# Altium PCB Layout.PcbDoc
Units mil, origin at the board's own origin, x right, y up, seen from the top; angles counter-clockwise.
Board outline 1735 x 1065 mil, 4 copper layers (Top Layer, Layer 1, Layer 2, Bottom Layer), stack 23.756 mil thick; 105 components, 105 nets, 934 pads, 0 vias.
Unrouted connection lines stored in the file: 567.
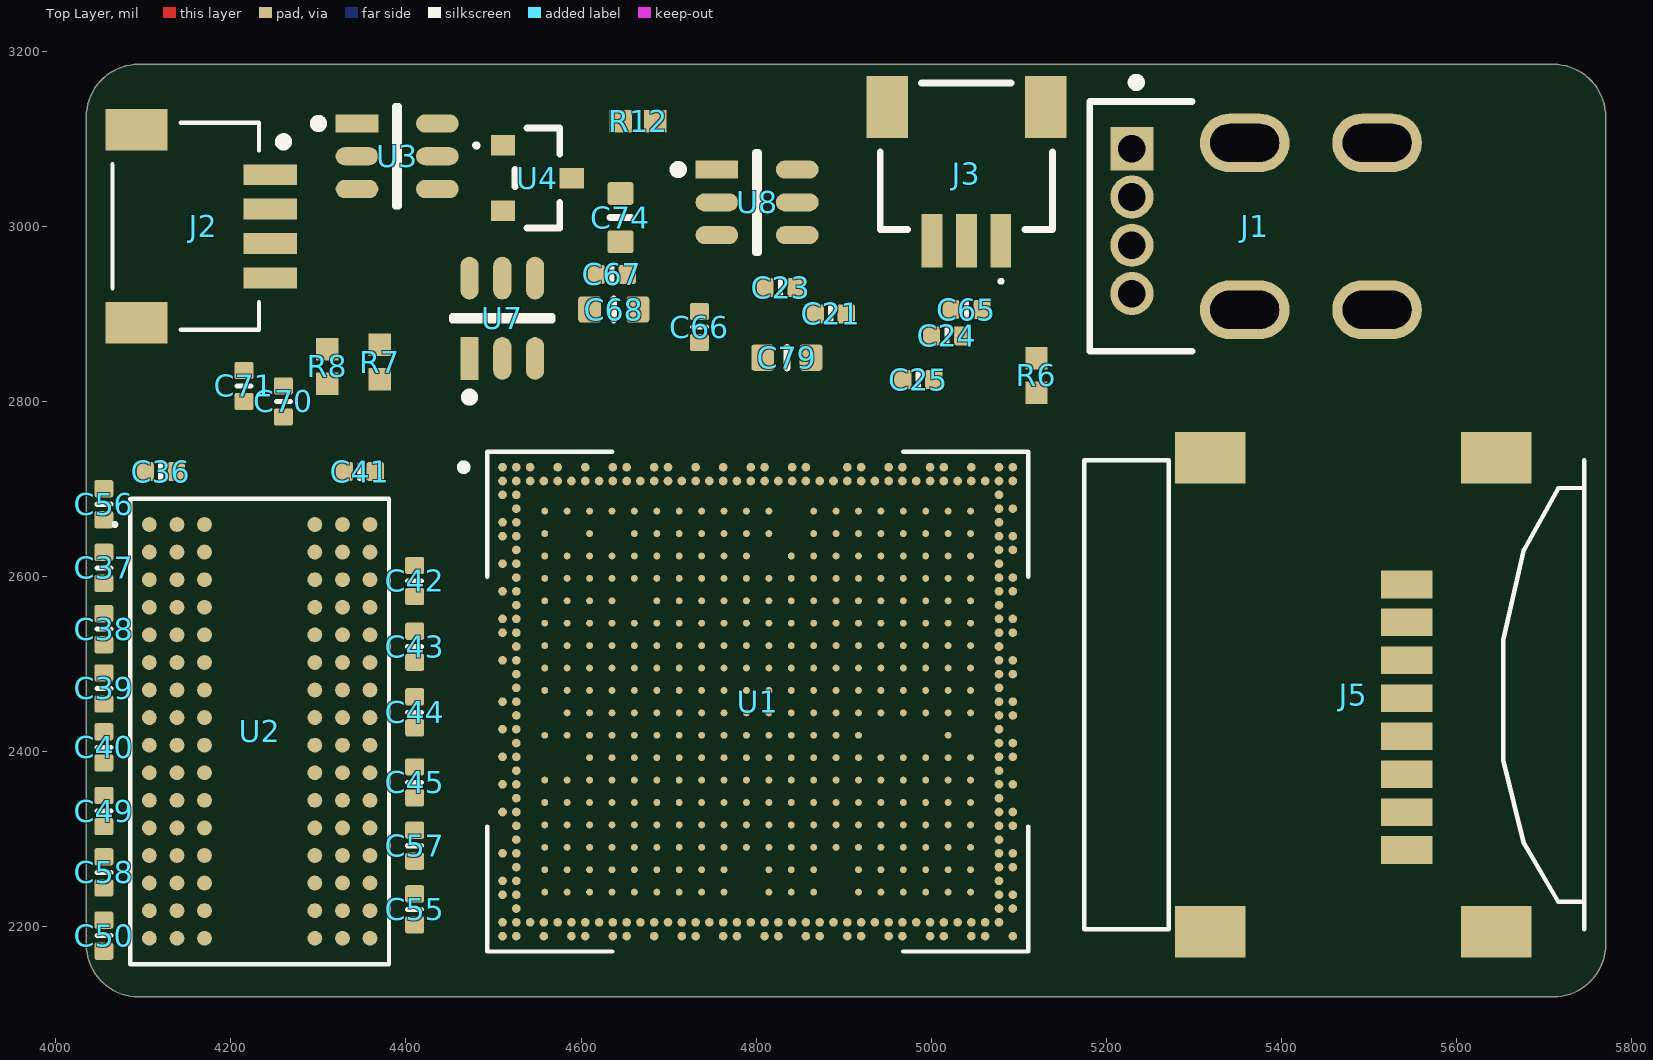
[diagram p0: Top Layer view]
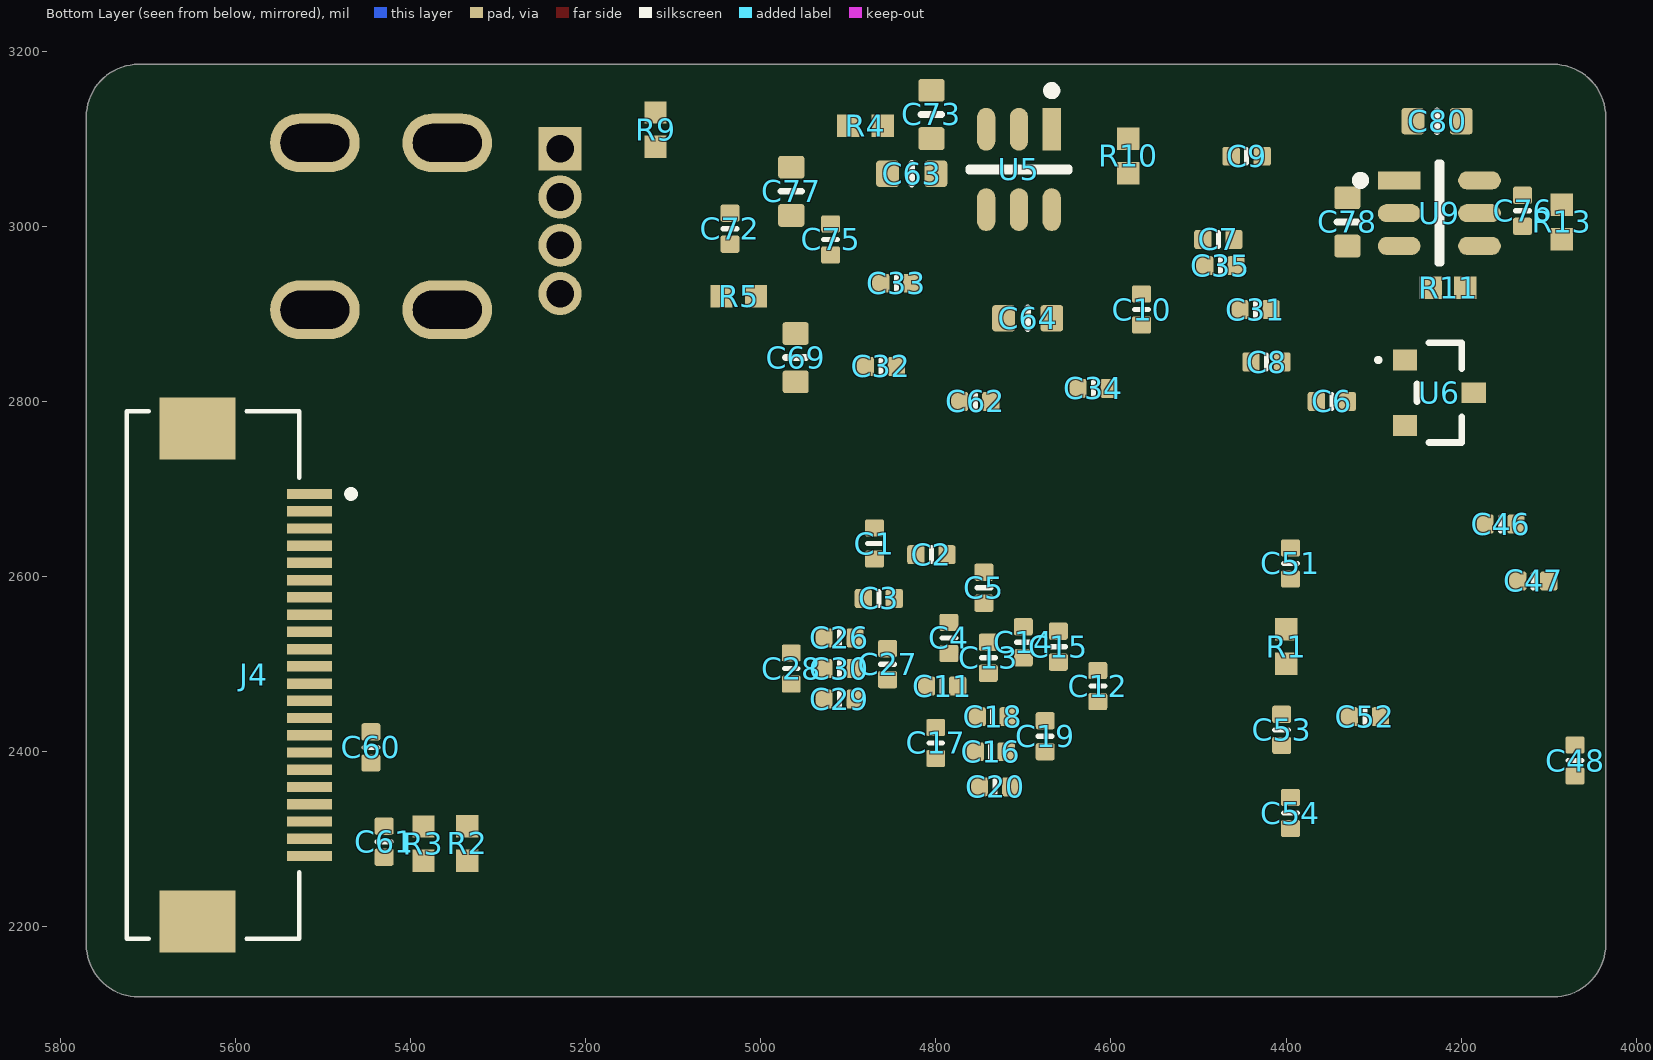
[diagram p1: Bottom Layer view, seen from below]

## Layer stack, top to bottom
Top Solder: solder mask 0.4, Solder Resist, Dk 3.5
Top Layer: signal copper 1.4
Dielectric 2: prepreg 2.8, PP-006, Dk 4.1
Layer 1: signal copper 1.378
Dielectric 1: dielectric 12.6, FR-4, Dk 4.8
Layer 2: signal copper 1.378
Dielectric 3: prepreg 2.8, PP-006, Dk 4.1
Bottom Layer: signal copper 1.4
Bottom Solder: solder mask 0.4, Solder Resist, Dk 3.5

## Board outline
4035,2180 4035,3125 cw(c4095,3125) 4095,3185 5710,3185 cw(c5710,3125) 5770,3125 5770,2180 cw(c5710,2180) 5710,2120 4095,2120 cw(c4095,2180)

## Design rules (kind name [scope] priority, off if disabled: settings)
Clearance [All] p1: gap=10 ignorepadtopadclearanceinfootprint=FALSE
PolygonConnect [All] p1: connectstyle=Relief reliefconductorwidth=10 reliefentries=4 polygonreliefangle="90 Angle" airgapwidth=10
RoutingVias [All] p1: holewidth=28 width=50 viastyle="Through Hole" minholewidth=28 minwidth=50 maxholewidth=28 maxwidth=50
SolderMaskExpansion [All] p1: expansion=4 istentingtop=FALSE
SupplyNets "Schematic Supply Nets_9" [InNet('VDDA_0V9')] p1: voltage=0.000
SupplyNets "Schematic Supply Nets_8" [InNet('VCC1V2_DDR')] p2: voltage=0.000
SupplyNets "Schematic Supply Nets_2" [InNet('VCC_1V8')] p3: voltage=0.000
SupplyNets "Schematic Supply Nets_6" [InNet('VCC0V9_CPU')] p4: voltage=0.000
SupplyNets "Schematic Supply Nets_3" [InNet('VDD0V9_GPU_NPU')] p5: voltage=0.000
SupplyNets "Schematic Supply Nets_1" [InNet('VDD0V9_LOGIC')] p6: voltage=0.000
SupplyNets "Schematic Supply Nets_24" [InNet('5V')] p7: voltage=0.000
SupplyNets "Schematic Supply Nets_19" [InNet('VDD_GPU')] p8: voltage=0.000
SupplyNets "Schematic Supply Nets_16" [InNet('VDD_LOGIC')] p9: voltage=0.000
SupplyNets "Schematic Supply Nets_15" [InNet('VCC_DDR')] p10: voltage=0.000
SupplyNets "Schematic Supply Nets_14" [InNet('VDD_NPU')] p11: voltage=0.000
SupplyNets "Schematic Supply Nets_12" [InNet('VCC0V6_DDR')] p12: voltage=0.000
SupplyNets "Schematic Supply Nets_11" [InNet('VCC5V0_SYS')] p13: voltage=0.000
SupplyNets "Schematic Supply Nets_7" [InNet('VDD_CPU')] p14: voltage=0.000
SupplyNets "Schematic Supply Nets_5" [InNet('VCC3V3_SYS')] p15: voltage=0.000
SupplyNets "Schematic Supply Nets_4" [InNet('GND')] p16: voltage=0.000
SupplyNets "Schematic Supply Nets" [InNet('VCC3V3_SD')] p17: voltage=0.000
Width [All] p1: maxlimit=10 minlimit=10 preferedwidth=10
30 further rules are at their usual default settings.

## Classes and differential pairs
component class U_Connectors: C60 C61 J1 J2 J3 J4 J5
component class U_RK3566: R2 R3 U1
component class U_RK3566_Power: C1 C2 C3 C4 C5 C6 C7 C8 C9 C10 C11 C12 C13 C14 C15 C16 C17 C18 C19 C20 C21 C23 C24 C25 C26 C27 C28 C29 C30 C31 C32 C33 C34 C35
component class U_Power: C62 C63 C64 C65 C66 C67 C68 C69 C70 C71 C72 C73 C74 C75 C76 C77 C78 C79 C80 L5 L6 R4 R5 R6 R7 R8 R9 R10 R11 R12 R13 U3 U4 U5 U6 U7 U8 U9 Y1
component class U_DDR4: C36 C37 C38 C39 C40 C41 C42 C43 C44 C45 C46 C47 C48 C49 C50 C51 C52 C53 C54 C55 C56 C57 C58 R1 U2

## Components (designator, comment, footprint, x,y, rotation, side; value= is the part's Value field where it differs from the comment)
C1 "GRM155R71H104KE14D" GRM155R71H104KE14D 4870,2637.72 r90 bottom value=100n
C2 "GRM155R71H104KE14D" GRM155R71H104KE14D 4805,2625 r180 bottom value=100n
C3 "GRM155R71H104KE14D" GRM155R71H104KE14D 4865,2575 r0 bottom value=100n
C4 "GRM155R71H104KE14D" GRM155R71H104KE14D 4785,2530 r270 bottom value=100n
C5 "GRM155R71H104KE14D" GRM155R71H104KE14D 4745,2587.28 r90 bottom value=100n
C6 "GRM155R71H104KE14D" GRM155R71H104KE14D 4347.72,2800 r180 bottom value=100n
C7 "GRM155R71H104KE14D" GRM155R71H104KE14D 4477.28,2985 r180 bottom value=100n
C8 "GRM155R71H104KE14D" GRM155R71H104KE14D 4422.28,2845 r180 bottom value=100n
C9 "GRM155R71H104KE14D" GRM155R71H104KE14D 4445,3080 r180 bottom value=100n
C10 "GRM155R71H104KE14D" GRM155R71H104KE14D 4565,2905 r90 bottom value=100n
C11 "GRM155R71H104KE14D" GRM155R71H104KE14D 4792.72,2475 r0 bottom value=100n
C12 "GRM155R71H104KE14D" GRM155R71H104KE14D 4615,2475 r90 bottom value=100n
C13 "GRM155R71H104KE14D" GRM155R71H104KE14D 4740,2507.28 r90 bottom value=100n
C14 "GRM155R71H104KE14D" GRM155R71H104KE14D 4700,2525 r90 bottom value=100n
C15 "GRM155R71H104KE14D" GRM155R71H104KE14D 4660,2520 r90 bottom value=100n
C16 "GRM155R71H104KE14D" GRM155R71H104KE14D 4737.28,2400 r180 bottom value=100n
C17 "GRM155R71H104KE14D" GRM155R71H104KE14D 4800,2410 r270 bottom value=100n
C18 "GRM155R71H104KE14D" GRM155R71H104KE14D 4735,2440 r0 bottom value=100n
C19 "GRM155R71H104KE14D" GRM155R71H104KE14D 4675,2417.72 r270 bottom value=100n
C20 "GRM155R71H104KE14D" GRM155R71H104KE14D 4732.28,2360 r180 bottom value=100n
C21 "GRM155R60J475ME47D" GRM155R60J475ME47D 4885,2900 r0 top value=4u7
C23 "GRM155R71H104KE14D" GRM155R71H104KE14D 4827.72,2930 r0 top value=100n
C24 "GRM155R71H104KE14D" GRM155R71H104KE14D 5017.72,2875 r0 top value=100n
C25 "GRM155R71H104KE14D" GRM155R71H104KE14D 4985,2825 r0 top value=100n
C26 "GRM155R71H104KE14D" GRM155R71H104KE14D 4910,2530 r180 bottom value=100n
C27 "GRM155R71H104KE14D" GRM155R71H104KE14D 4855,2500 r90 bottom value=100n
C28 "GRM155R71H104KE14D" GRM155R71H104KE14D 4965,2495 r90 bottom value=100n
C29 "GRM155R71H104KE14D" GRM155R71H104KE14D 4910,2460 r180 bottom value=100n
C30 "GRM155R71H104KE14D" GRM155R71H104KE14D 4910,2495 r180 bottom value=100n
C31 "GRM155R60J475ME47D" GRM155R60J475ME47D 4435,2905 r180 bottom value=4u7
C32 "GRM155R60J475ME47D" GRM155R60J475ME47D 4862.72,2840 r180 bottom value=4u7
C33 "GRM155R71H104KE14D" GRM155R71H104KE14D 4845,2935 r180 bottom value=100n
C34 "GRM155R71H104KE14D" GRM155R71H104KE14D 4620,2815 r180 bottom value=100n
C35 "GRM155R71H104KE14D" GRM155R71H104KE14D 4475,2955 r180 bottom value=100n
C36 "GRM155R71H104KE14D" GRM155R71H104KE14D 4120,2720 r0 top value=100n
C37 "GRM155R71H104KE14D" GRM155R71H104KE14D 4055,2610 r90 top value=100n
C38 "GRM155R71H104KE14D" GRM155R71H104KE14D 4055,2540 r90 top value=100n
C39 "GRM155R71H104KE14D" GRM155R71H104KE14D 4055,2472.28 r270 top value=100n
C40 "GRM155R71H104KE14D" GRM155R71H104KE14D 4055,2405 r270 top value=100n
C41 "GRM155R71H104KE14D" GRM155R71H104KE14D 4347.28,2720 r180 top value=100n
C42 "GRM155R71H104KE14D" GRM155R71H104KE14D 4410,2595 r90 top value=100n
C43 "GRM155R71H104KE14D" GRM155R71H104KE14D 4410,2520 r90 top value=100n
C44 "GRM155R71H104KE14D" GRM155R71H104KE14D 4410,2445 r270 top value=100n
C45 "GRM155R71H104KE14D" GRM155R71H104KE14D 4410,2365 r90 top value=100n
C46 "GRM155R71H104KE14D" GRM155R71H104KE14D 4155,2660 r180 bottom value=100n
C47 "GRM155R71H104KE14D" GRM155R71H104KE14D 4117.72,2595 r0 bottom value=100n
C48 "GRM155R71H104KE14D" GRM155R71H104KE14D 4070,2390 r270 bottom value=100n
C49 "GRM155R71H104KE14D" GRM155R71H104KE14D 4055,2332.28 r270 top value=100n
C50 "GRM155R71H104KE14D" GRM155R71H104KE14D 4055,2190 r270 top value=100n
C51 "GRM155R71H104KE14D" GRM155R71H104KE14D 4395,2615 r270 bottom value=100n
C52 "GRM155R71H104KE14D" GRM155R71H104KE14D 4310,2440 r0 bottom value=100n
C53 "GRM155R71H104KE14D" GRM155R71H104KE14D 4405,2425 r90 bottom value=100n
C54 "GRM155R71H104KE14D" GRM155R71H104KE14D 4395,2330 r90 bottom value=100n
C55 "GRM155R71H104KE14D" GRM155R71H104KE14D 4410,2220 r90 top value=100n
C56 "GRM155R61E105KA12D" GRM155R61E105KA12D 4055,2682.72 r90 top value=1u
C57 "GRM155R61E105KA12D" GRM155R61E105KA12D 4410,2292.72 r90 top value=1u
C58 "GRM155R71H104KE14D" GRM155R71H104KE14D 4055,2262.28 r270 top value=100n
C60 "GRM155R71H104KE14D" GRM155R71H104KE14D 5445,2405 r90 bottom value=100n
C61 "GRM155R61E105KA12D" GRM155R61E105KA12D 5430,2297.28 r90 bottom value=1u
C62 "GRM155R61E105KA12D" GRM155R61E105KA12D 4755,2800 r0 bottom value=1u
C63 "GRM188R61C226ME01D" GRM188R61C226ME01D 4827.44,3060 r0 bottom value=22u
C64 "GRM188R61C226ME01D" GRM188R61C226ME01D 4695,2895 r0 bottom value=22u
C65 "GRM155R61E105KA12D" GRM155R61E105KA12D 5040,2905 r180 top value=1u
C66 "GRM155R61E105KA12D" GRM155R61E105KA12D 4735,2885 r270 top value=1u
C67 "GRM155R61E105KA12D" GRM155R61E105KA12D 4635,2945 r180 top value=1u
C68 "GRM188R61C226ME01D" GRM188R61C226ME01D 4637.28,2905 r180 top value=22u
C69 "GRM188R61C226ME01D" GRM188R61C226ME01D 4960,2850 r90 bottom value=22u
C70 "GRM155R61E105KA12D" GRM155R61E105KA12D 4260,2800 r90 top value=1u
C71 "GRM155R61E105KA12D" GRM155R61E105KA12D 4215,2817.72 r90 top value=1u
C72 "GRM155R61E105KA12D" GRM155R61E105KA12D 5035,2997.28 r90 bottom value=1u
C73 "GRM188R61C226ME01D" GRM188R61C226ME01D 4805,3127.72 r90 bottom value=22u
C74 "GRM188R61C226ME01D" GRM188R61C226ME01D 4645,3010 r90 top value=22u
C75 "GRM155R61E105KA12D" GRM155R61E105KA12D 4920,2985 r90 bottom value=1u
C76 "GRM155R61E105KA12D" GRM155R61E105KA12D 4130,3017.72 r90 bottom value=1u
C77 "GRM188R61C226ME01D" GRM188R61C226ME01D 4965,3040 r90 bottom value=22u
C78 "GRM188R61C226ME01D" GRM188R61C226ME01D 4330,3005 r90 bottom value=22u
C79 "GRM188R61C226ME01D" GRM188R61C226ME01D 4835,2850 r180 top value=22u
C80 "GRM188R61C226ME01D" GRM188R61C226ME01D 4227.56,3120 r180 bottom value=22u
J1 "673298000" 673298000 5455,3000 r90 top
J2 "SM04B-SRSS-TB" SM04B-SRSS-TB 4245,3000 r270 top
J3 "SM03B-SRSS-TB" SM03B-SRSS-TB 5040,3080 r180 top
J4 "F305-1A7H1-21022-E100" F305-1A7H1-21022-E100 5625.24,2487.68 r270 bottom
J5 "47219-2001" 47219-2001 5460,2465 r90 top
R1 "RES 240" RC0402FR-0718KL 4400,2520 r90 bottom value=240
R2 "RES 2.2K" RC0402FR-075K6L 5335,2295.31 r90 bottom value=2k2
R3 "RES 2.2K" RC0402FR-075K6L 5385,2295 r90 bottom value=2k2
R4 "RC0402FR-075K6L" RC0402FR-075K6L 4880.31,3115 r180 bottom value=5k6
R5 "RC0402FR-071KL" RC0402FR-071KL 5025,2920 r180 bottom value=1k
R6 "RC0402FR-075K6L" RC0402FR-075K6L 5120,2829.68 r90 top value=5k6
R7 "RC0402FR-071KL" RC0402FR-071KL 4370,2845 r90 top value=1k
R8 "RC0402FR-075K6L" RC0402FR-075K6L 4310,2840 r90 top value=5k6
R9 "RC0402FR-071KL" RC0402FR-071KL 5120,3110.31 r90 bottom value=1k
R10 "RC0402FR-075K6L" RC0402FR-075K6L 4580,3080.31 r90 bottom value=5k6
R11 "RC0402FR-075K6L" RC0402FR-075K6L 4215,2930 r180 bottom value=5k6
R12 "RC0402FR-071KL" RC0402FR-071KL 4665,3120 r180 top value=1k
R13 "RC0402FR-071KL" RC0402FR-071KL 4085,3005 r90 bottom value=1k
U1 "RK3566" RK3566 4801.61,2457.2 r0 top
U2 "MT40A512M16LY-075:E" MT40A512M16LY-075:E 4232.99,2423.27 r0 top
U3 "AP63300QWU-7" AP63300QWU-7 4390,3080 r0 top
U4 "AP2138N-3.3TRG1" AP2138N-3.3TRG1 4550,3055 r0 top
U5 "AP63300QWU-7" AP63300QWU-7 4705,3065 r270 bottom
U6 "AP2138N-3.3TRG1" AP2138N-3.3TRG1 4225,2810 r180 bottom
U7 "AP63300QWU-7" AP63300QWU-7 4510,2895 r90 top
U8 "AP63300QWU-7" AP63300QWU-7 4800.89,3027.4 r0 top
U9 "AP63300QWU-7" AP63300QWU-7 4225,3015 r180 bottom

## Footprints (in the part's own frame and the unit in brackets; to place one, negate y for a bottom-side part, rotate by r counter-clockwise, add the part's x,y. Pads: shape width x height; smd on the part's side, far side on the other; paste and mask are expansions set on the pad)
47219-2001 [mm] "MicroSD Hinge Molex"
  rect 0.8x1.5 smd: 1(3.2,-2.1) 2(2.1,-2.1) 3(1,-2.1) 4(-0.1,-2.1) 5(-1.2,-2.1) 6(-2.3,-2.1) 7(-3.4,-2.1) 8(-4.5,-2.1)
  rect 1.5x2.05 smd: G1(6.875,-4.7) G2(6.875,3.6) G3(-6.875,3.6) G4(-6.875,-4.7)
  silkscreen extent -6.8,-7.25 6.8,7.25, body extent -7.3,-7.21 7.3,7.28, height 1.87
673298000 [mm]
  rect 1.25x1.25 hole 0.8 paste-2539.97 mask+0: 1(2.25,5.74)
  round 1.25 hole 0.8 paste-2539.97 mask+0: 2(0.85,5.74) 3(-0.55,5.74) 4(-1.95,5.74)
  oval 1.7x2.6 hole 2 slot 1.1 at 0 deg paste-2539.97 mask+0: 5(-2.42,2.47) 6(2.42,2.47) 7(-2.42,-1.37) 8(2.42,-1.37)
  silkscreen extent -3.62,4 4.3,6.97, body extent -3.5,-6.84 3.5,6.84, height 14.52
AP2138N-3.3TRG1 [mm] "SOT23, 3-Leads, Body 2.9x1.3mm, Pitch 0.95mm"
  rect 0.7x0.6 smd paste-0.05: 1(-1,0.95) 2(-1,-0.95) 3(1,0)
  silkscreen extent -1.79,-1.45 0.65,1.45, body extent -1.3,-1.5 1.3,1.5, height 1.1
AP63300QWU-7 [mm]
  rect 1.24x0.526 smd paste+0 mask+0: 1(-1.165,0.95)
  rrect100% 1.24x0.526 smd paste+0 mask+0: 2(-1.165,0) 3(-1.165,-0.95) 4(1.166,-0.95) 5(1.166,0) 6(1.166,0.95)
  silkscreen extent -2.41,-1.45 0.05,1.45, body extent -2.04,-1.7 2.04,1.7, height 0.25
F305-1A7H1-21022-E100 [mm] "Amphenol FPC 22P 0.5mm"
  rect 0.3x1.3 smd mask+0.05: 1(-5.25,2.8) 2(-4.75,2.8) 3(-4.25,2.8) 4(-3.75,2.8) 5(-3.25,2.8) 6(-2.75,2.8) 7(-2.25,2.8) 8(-1.75,2.8) 9(-1.25,2.8) 10(-0.75,2.8) 11(-0.25,2.8) 12(0.25,2.8) 13(0.75,2.8) 14(1.25,2.8) 15(1.75,2.8) 16(2.25,2.8) 17(2.75,2.8) 18(3.25,2.8) 19(3.75,2.8) 20(4.25,2.8) 21(4.75,2.8) 22(5.25,2.8)
  rect 1.8x2.2 smd: SH1(-7.15,-0.45) SH2(7.15,-0.45)
  silkscreen extent -7.65,-2.5 7.65,4.1, body extent -7.65,-2.25 7.65,3.45, height 2
GRM155R60J475ME47D [mm] "Chip Capacitor, Body 1.0x0.5mm, Height 0.6mm, IPC High Density"
  rrect25% 0.5x0.55 smd: 1(-0.45,0) 2(0.45,0)
  silkscreen extent 0,-0.2 0,0.2, body extent -0.5,-0.25 0.5,0.25, height 0.6
GRM155R61E105KA12D [mm] "Chip Capacitor, Body 1.0x0.5mm, Height 0.6mm, IPC High Density"
  rrect25% 0.5x0.55 smd: 1(-0.45,0) 2(0.45,0)
  silkscreen extent 0,-0.2 0,0.2, body extent -0.5,-0.25 0.5,0.25, height 0.6
GRM155R71H104KE14D [mm] "Chip Capacitor, Body 1.0x0.5mm, Height 0.6mm, IPC High Density"
  rrect25% 0.5x0.55 smd: 1(-0.45,0) 2(0.45,0)
  silkscreen extent 0,-0.2 0,0.2, body extent -0.5,-0.25 0.5,0.25, height 0.6
GRM188R61C226ME01D [mm] "Chip Capacitor, Body 1.6x0.8mm, Height 1.0mm, IPC High Density"
  rrect25% 0.66x0.76 smd: 1(-0.7,0) 2(0.7,0)
  silkscreen extent 0,-0.3 0,0.3, body extent -0.8,-0.4 0.8,0.4, height 0.95
MT40A512M16LY-075:E [mm]
  round 0.43 smd: A1(-3.2,6) A2(-2.4,6) A3(-1.6,6) A7(1.6,6) A8(2.4,6) A9(3.2,6) B1(-3.2,5.2) B2(-2.4,5.2) B3(-1.6,5.2) B7(1.6,5.2) B8(2.4,5.2) B9(3.2,5.2) C1(-3.2,4.4) C2(-2.4,4.4) C3(-1.6,4.4) C7(1.6,4.4) C8(2.4,4.4) C9(3.2,4.4) D1(-3.2,3.6) D2(-2.4,3.6) D3(-1.6,3.6) D7(1.6,3.6) D8(2.4,3.6) D9(3.2,3.6) E1(-3.2,2.8) E2(-2.4,2.8) E3(-1.6,2.8) E7(1.6,2.8) E8(2.4,2.8) E9(3.2,2.8) F1(-3.2,2) F2(-2.4,2) F3(-1.6,2) F7(1.6,2) F8(2.4,2) F9(3.2,2) G1(-3.2,1.2) G2(-2.4,1.2) G3(-1.6,1.2) G7(1.6,1.2) G8(2.4,1.2) G9(3.2,1.2) H1(-3.2,0.4) H2(-2.4,0.4) H3(-1.6,0.4) H7(1.6,0.4) H8(2.4,0.4) H9(3.2,0.4) J1(-3.2,-0.4) J2(-2.4,-0.4) J3(-1.6,-0.4) J7(1.6,-0.4) J8(2.4,-0.4) J9(3.2,-0.4) K1(-3.2,-1.2) K2(-2.4,-1.2) K3(-1.6,-1.2) K7(1.6,-1.2) K8(2.4,-1.2) K9(3.2,-1.2) L1(-3.2,-2) L2(-2.4,-2) L3(-1.6,-2) L7(1.6,-2) L8(2.4,-2) L9(3.2,-2) M1(-3.2,-2.8) M2(-2.4,-2.8) M3(-1.6,-2.8) M7(1.6,-2.8) M8(2.4,-2.8) M9(3.2,-2.8) N1(-3.2,-3.6) N2(-2.4,-3.6) N3(-1.6,-3.6) N7(1.6,-3.6) N8(2.4,-3.6) N9(3.2,-3.6) P1(-3.2,-4.4) P2(-2.4,-4.4) P3(-1.6,-4.4) P7(1.6,-4.4) P8(2.4,-4.4) P9(3.2,-4.4) R1(-3.2,-5.2) R2(-2.4,-5.2) R3(-1.6,-5.2) R7(1.6,-5.2) R8(2.4,-5.2) R9(3.2,-5.2) T1(-3.2,-6) T2(-2.4,-6) T3(-1.6,-6) T7(1.6,-6) T8(2.4,-6) T9(3.2,-6)
  silkscreen extent -4.25,-6.75 3.75,6.75, body extent -3.75,-6.75 3.75,6.75, height 1.2
RC0402FR-071KL [mm] "Chip Resistor, 2-Leads, Body 1.05x0.55mm, IPC Low Density"
  rect 0.65x0.65 smd: 1(-0.5,0) 2(0.5,0)
  body extent -0.53,-0.28 0.53,0.28, height 0.4
RC0402FR-075K6L [mm] "Chip Resistor, 2-Leads, Body 1.05x0.55mm, IPC Low Density"
  rect 0.65x0.65 smd: 1(-0.5,0) 2(0.5,0)
  body extent -0.53,-0.28 0.53,0.28, height 0.4
RC0402FR-0718KL [mm] "Chip Resistor, 2-Leads, Body 1.05x0.55mm, IPC Low Density"
  rect 0.65x0.65 smd: 1(-0.5,0) 2(0.5,0)
  body extent -0.53,-0.28 0.53,0.28, height 0.4
RK3566 [mm]
  round 0.2 smd mask+0.05: 1A1(-6.175,5.525) 1A2(-5.525,5.525) 1A3(-4.875,5.525) 1A4(-4.225,5.525) 1A5(-3.575,5.525) 1A6(-2.925,5.525) 1A7(-2.275,5.525) 1A8(-1.625,5.525) 1A9(-0.975,5.525) 1A10(-0.325,5.525) 1A11(0.325,5.525) 1A13(1.625,5.525) 1A14(2.275,5.525) 1A15(2.925,5.525) 1A16(3.575,5.525) 1A17(4.225,5.525) 1A18(4.875,5.525) 1A19(5.525,5.525) 1A20(6.175,5.525) 1B1(-6.175,4.875) 1B3(-4.875,4.875) 1B5(-3.575,4.875) 1B6(-2.925,4.875) 1B7(-2.275,4.875) 1B8(-1.625,4.875) 1B9(-0.975,4.875) 1B10(-0.325,4.875) 1B11(0.325,4.875) 1B13(1.625,4.875) 1B14(2.275,4.875) 1B15(2.925,4.875) 1B16(3.575,4.875) 1B17(4.225,4.875) 1B18(4.875,4.875) 1B19(5.525,4.875) 1B20(6.175,4.875) 1C1(-6.175,4.225) 1C2(-5.525,4.225) 1C3(-4.875,4.225) 1C4(-4.225,4.225) 1C5(-3.575,4.225) 1C6(-2.925,4.225) 1C7(-2.275,4.225) 1C8(-1.625,4.225) 1C9(-0.975,4.225) 1C10(-0.325,4.225) 1C12(0.975,4.225) 1C13(1.625,4.225) 1C14(2.275,4.225) 1C15(2.925,4.225) 1C16(3.575,4.225) 1C17(4.225,4.225) 1C18(4.875,4.225) 1C19(5.525,4.225) 1C20(6.175,4.225) 1D1(-6.175,3.575) 1D2(-5.525,3.575) 1D3(-4.875,3.575) 1D4(-4.225,3.575) 1D5(-3.575,3.575) 1D6(-2.925,3.575) 1D7(-2.275,3.575) 1D8(-1.625,3.575) 1D9(-0.975,3.575) 1D10(-0.325,3.575) 1D11(0.325,3.575) 1D12(0.975,3.575) 1D13(1.625,3.575) 1D14(2.275,3.575) 1D15(2.925,3.575) 1D16(3.575,3.575) 1D17(4.225,3.575) 1D18(4.875,3.575) 1D19(5.525,3.575) 1D20(6.175,3.575) 1E1(-6.175,2.925) 1E2(-5.525,2.925) 1E3(-4.875,2.925) 1E4(-4.225,2.925) 1E6(-2.925,2.925) 1E7(-2.275,2.925) 1E8(-1.625,2.925) 1E9(-0.975,2.925) 1E10(-0.325,2.925) 1E11(0.325,2.925) 1E12(0.975,2.925) 1E13(1.625,2.925) 1E14(2.275,2.925) 1E15(2.925,2.925) 1E16(3.575,2.925) 1E17(4.225,2.925) 1E18(4.875,2.925) 1E19(5.525,2.925) 1E20(6.175,2.925) 1F1(-6.175,2.275) 1F2(-5.525,2.275) 1F3(-4.875,2.275) 1F4(-4.225,2.275) 1F5(-3.575,2.275) 1F6(-2.925,2.275) 1F7(-2.275,2.275) 1F8(-1.625,2.275) 1F9(-0.975,2.275) 1F10(-0.325,2.275) 1F11(0.325,2.275) 1F12(0.975,2.275) 1F13(1.625,2.275) 1F14(2.275,2.275) 1F15(2.925,2.275) 1F16(3.575,2.275) 1F17(4.225,2.275) 1F18(4.875,2.275) 1F19(5.525,2.275) 1F20(6.175,2.275) 1G1(-6.175,1.625) 1G2(-5.525,1.625) 1G3(-4.875,1.625) 1G4(-4.225,1.625) 1G5(-3.575,1.625) 1G6(-2.925,1.625) 1G7(-2.275,1.625) 1G8(-1.625,1.625) 1G9(-0.975,1.625) 1G10(-0.325,1.625) 1G11(0.325,1.625) 1G12(0.975,1.625) 1G13(1.625,1.625) 1G14(2.275,1.625) 1G15(2.925,1.625) 1G16(3.575,1.625) 1G17(4.225,1.625) 1G18(4.875,1.625) 1G19(5.525,1.625) 1G20(6.175,1.625) 1H1(-6.175,0.975) 1H2(-5.525,0.975) 1H3(-4.875,0.975) 1H4(-4.225,0.975) 1H5(-3.575,0.975) 1H6(-2.925,0.975) 1H7(-2.275,0.975) 1H8(-1.625,0.975) 1H9(-0.975,0.975) 1H10(-0.325,0.975) 1H11(0.325,0.975) 1H12(0.975,0.975) 1H13(1.625,0.975) 1H14(2.275,0.975) 1H15(2.925,0.975) 1H16(3.575,0.975) 1H17(4.225,0.975) 1H18(4.875,0.975) 1H19(5.525,0.975) 1H20(6.175,0.975) 1J1(-6.175,0.325) 1J2(-5.525,0.325) 1J3(-4.875,0.325) 1J4(-4.225,0.325) 1J5(-3.575,0.325) 1J6(-2.925,0.325) 1J7(-2.275,0.325) 1J8(-1.625,0.325) 1J9(-0.975,0.325) 1J10(-0.325,0.325) 1J11(0.325,0.325) 1J12(0.975,0.325) 1J13(1.625,0.325) 1J14(2.275,0.325) 1J15(2.925,0.325) 1J16(3.575,0.325) 1J17(4.225,0.325) 1J18(4.875,0.325) 1J19(5.525,0.325) 1J20(6.175,0.325) 1K2(-5.525,-0.325) 1K3(-4.875,-0.325) 1K4(-4.225,-0.325) 1K5(-3.575,-0.325) 1K6(-2.925,-0.325) 1K7(-2.275,-0.325) 1K8(-1.625,-0.325) 1K9(-0.975,-0.325) 1K10(-0.325,-0.325) 1K11(0.325,-0.325) 1K12(0.975,-0.325) 1K13(1.625,-0.325) 1K14(2.275,-0.325) 1K15(2.925,-0.325) 1K16(3.575,-0.325) 1K17(4.225,-0.325) 1K18(4.875,-0.325) 1K19(5.525,-0.325) 1K20(6.175,-0.325) 1L1(-6.175,-0.975) 1L2(-5.525,-0.975) 1L3(-4.875,-0.975) 1L4(-4.225,-0.975) 1L5(-3.575,-0.975) 1L6(-2.925,-0.975) 1L7(-2.275,-0.975) 1L8(-1.625,-0.975) 1L9(-0.975,-0.975) 1L10(-0.325,-0.975) 1L11(0.325,-0.975) 1L12(0.975,-0.975) 1L13(1.625,-0.975) 1L14(2.275,-0.975) 1L15(2.925,-0.975) 1L19(5.525,-0.975) 1M3(-4.875,-1.625) 1M4(-4.225,-1.625) 1M5(-3.575,-1.625) 1M6(-2.925,-1.625) 1M7(-2.275,-1.625) 1M8(-1.625,-1.625) 1M9(-0.975,-1.625) 1M10(-0.325,-1.625) 1M11(0.325,-1.625) 1M12(0.975,-1.625) 1M13(1.625,-1.625) 1M14(2.275,-1.625) 1M15(2.925,-1.625) 1M16(3.575,-1.625) 1M17(4.225,-1.625) 1M18(4.875,-1.625) 1M19(5.525,-1.625) 1M20(6.175,-1.625) 1N1(-6.175,-2.275) 1N2(-5.525,-2.275) 1N3(-4.875,-2.275) 1N4(-4.225,-2.275) 1N5(-3.575,-2.275) 1N6(-2.925,-2.275) 1N7(-2.275,-2.275) 1N8(-1.625,-2.275) 1N9(-0.975,-2.275) 1N10(-0.325,-2.275) 1N11(0.325,-2.275) 1N12(0.975,-2.275) 1N13(1.625,-2.275) 1N14(2.275,-2.275) 1N15(2.925,-2.275) 1N16(3.575,-2.275) 1N17(4.225,-2.275) 1N18(4.875,-2.275) 1N19(5.525,-2.275) 1N20(6.175,-2.275) 1P1(-6.175,-2.925) 1P2(-5.525,-2.925) 1P3(-4.875,-2.925) 1P4(-4.225,-2.925) 1P5(-3.575,-2.925) 1P6(-2.925,-2.925) 1P7(-2.275,-2.925) 1P8(-1.625,-2.925) 1P9(-0.975,-2.925) 1P10(-0.325,-2.925) 1P11(0.325,-2.925) 1P12(0.975,-2.925) 1P13(1.625,-2.925) 1P14(2.275,-2.925) 1P15(2.925,-2.925) 1P16(3.575,-2.925) 1P17(4.225,-2.925) 1P18(4.875,-2.925) 1P19(5.525,-2.925) 1P20(6.175,-2.925) 1R1(-6.175,-3.575) 1R2(-5.525,-3.575) 1R3(-4.875,-3.575) 1R4(-4.225,-3.575) 1R5(-3.575,-3.575) 1R6(-2.925,-3.575) 1R7(-2.275,-3.575) 1R8(-1.625,-3.575) 1R9(-0.975,-3.575) 1R10(-0.325,-3.575) 1R11(0.325,-3.575) 1R12(0.975,-3.575) 1R13(1.625,-3.575) 1R14(2.275,-3.575) 1R15(2.925,-3.575) 1R16(3.575,-3.575) 1R17(4.225,-3.575) 1R18(4.875,-3.575) 1R19(5.525,-3.575) 1R20(6.175,-3.575) 1T1(-6.175,-4.225) 1T2(-5.525,-4.225) 1T3(-4.875,-4.225) 1T4(-4.225,-4.225) 1T5(-3.575,-4.225) 1T6(-2.925,-4.225) 1T7(-2.275,-4.225) 1T8(-1.625,-4.225) 1T9(-0.975,-4.225) 1T10(-0.325,-4.225) 1T11(0.325,-4.225) 1T12(0.975,-4.225) 1T13(1.625,-4.225) 1T14(2.275,-4.225) 1T15(2.925,-4.225) 1T16(3.575,-4.225) 1T17(4.225,-4.225) 1T18(4.875,-4.225) 1T19(5.525,-4.225) 1T20(6.175,-4.225) 1U1(-6.175,-4.875) 1U2(-5.525,-4.875) 1U3(-4.875,-4.875) 1U4(-4.225,-4.875) 1U5(-3.575,-4.875) 1U6(-2.925,-4.875) 1U7(-2.275,-4.875) 1U8(-1.625,-4.875) 1U9(-0.975,-4.875) 1U11(0.325,-4.875) 1U12(0.975,-4.875) 1U13(1.625,-4.875) 1U15(2.925,-4.875) 1U16(3.575,-4.875) 1U17(4.225,-4.875) 1U18(4.875,-4.875) 1U19(5.525,-4.875) 1U20(6.175,-4.875) 1V1(-6.175,-5.525) 1V2(-5.525,-5.525) 1V3(-4.875,-5.525) 1V4(-4.225,-5.525) 1V5(-3.575,-5.525) 1V6(-2.925,-5.525) 1V7(-2.275,-5.525) 1V8(-1.625,-5.525) 1V9(-0.975,-5.525) 1V11(0.325,-5.525) 1V12(0.975,-5.525) 1V13(1.625,-5.525) 1V15(2.925,-5.525) 1V16(3.575,-5.525) 1V17(4.225,-5.525) 1V18(4.875,-5.525) 1V19(5.525,-5.525) 1V20(6.175,-5.525)
  round 0.25 smd mask+0.05: A1(-7.4,6.8) A2(-7,6.8) A3(-6.6,6.8) A5(-5.8,6.8) A7(-5,6.8) A9(-4.2,6.8) A10(-3.8,6.8) A12(-3,6.8) A13(-2.6,6.8) A15(-1.8,6.8) A17(-1,6.8) A19(-0.2,6.8) A20(0.2,6.8) A22(1,6.8) A23(1.4,6.8) A26(2.6,6.8) A27(3,6.8) A29(3.8,6.8) A30(4.2,6.8) A32(5,6.8) A33(5.4,6.8) A35(6.2,6.8) A37(7,6.8) A38(7.4,6.8) AA2(-7,-1.2) AA37(7,-1.2) AA38(7.4,-1.2) AB1(-7.4,-1.6) AB2(-7,-1.6) AB37(7,-1.6) AB38(7.4,-1.6) AC2(-7,-2) AC37(7,-2) AD1(-7.4,-2.4) AD2(-7,-2.4) AD37(7,-2.4) AD38(7.4,-2.4) AE2(-7,-2.8) AE37(7,-2.8) AF1(-7.4,-3.2) AF2(-7,-3.2) AF37(7,-3.2) AF38(7.4,-3.2) AG2(-7,-3.6) AG37(7,-3.6) AG38(7.4,-3.6) AH2(-7,-4) AH37(7,-4) AJ1(-7.4,-4.4) AJ2(-7,-4.4) AJ37(7,-4.4) AJ38(7.4,-4.4) AK2(-7,-4.8) AK37(7,-4.8) AK38(7.4,-4.8) AL1(-7.4,-5.2) AL2(-7,-5.2) AL37(7,-5.2) AM1(-7.4,-5.6) AM2(-7,-5.6) AM37(7,-5.6) AM38(7.4,-5.6) AN2(-7,-6) AN37(7,-6) AN38(7.4,-6) AP1(-7.4,-6.4) AP2(-7,-6.4) AP3(-6.6,-6.4) AP4(-6.2,-6.4) AP5(-5.8,-6.4) AP6(-5.4,-6.4) AP7(-5,-6.4) AP8(-4.6,-6.4) AP9(-4.2,-6.4) AP10(-3.8,-6.4) AP11(-3.4,-6.4) AP12(-3,-6.4) AP13(-2.6,-6.4) AP14(-2.2,-6.4) AP15(-1.8,-6.4) AP16(-1.4,-6.4) AP17(-1,-6.4) AP18(-0.6,-6.4) AP19(-0.2,-6.4) AP20(0.2,-6.4) AP21(0.6,-6.4) AP22(1,-6.4) AP23(1.4,-6.4) AP24(1.8,-6.4) AP25(2.2,-6.4) AP26(2.6,-6.4) AP27(3,-6.4) AP28(3.4,-6.4) AP29(3.8,-6.4) AP30(4.2,-6.4) AP31(4.6,-6.4) AP32(5,-6.4) AP33(5.4,-6.4) AP34(5.8,-6.4) AP35(6.2,-6.4) AP36(6.6,-6.4) AP37(7,-6.4) AR1(-7.4,-6.8) AR2(-7,-6.8) AR4(-6.2,-6.8) AR6(-5.4,-6.8) AR7(-5,-6.8) AR9(-4.2,-6.8) AR10(-3.8,-6.8) AR12(-3,-6.8) AR14(-2.2,-6.8) AR15(-1.8,-6.8) AR17(-1,-6.8) AR18(-0.6,-6.8) AR20(0.2,-6.8) AR21(0.6,-6.8) AR23(1.4,-6.8) AR24(1.8,-6.8) AR26(2.6,-6.8) AR27(3,-6.8) AR29(3.8,-6.8) AR30(4.2,-6.8) AR32(5,-6.8) AR33(5.4,-6.8) AR35(6.2,-6.8) AR36(6.6,-6.8) AR38(7.4,-6.8) B1(-7.4,6.4) B2(-7,6.4) B3(-6.6,6.4) B4(-6.2,6.4) B5(-5.8,6.4) B6(-5.4,6.4) B7(-5,6.4) B8(-4.6,6.4) B9(-4.2,6.4) B10(-3.8,6.4) B11(-3.4,6.4) B12(-3,6.4) B13(-2.6,6.4) B14(-2.2,6.4) B15(-1.8,6.4) B16(-1.4,6.4) B17(-1,6.4) B18(-0.6,6.4) B19(-0.2,6.4) B20(0.2,6.4) B21(0.6,6.4) B22(1,6.4) B23(1.4,6.4) B24(1.8,6.4) B25(2.2,6.4) B26(2.6,6.4) B27(3,6.4) B28(3.4,6.4) B29(3.8,6.4) B30(4.2,6.4) B31(4.6,6.4) B32(5,6.4) B33(5.4,6.4) B34(5.8,6.4) B35(6.2,6.4) B36(6.6,6.4) B37(7,6.4) B38(7.4,6.4) C1(-7.4,6) C2(-7,6) C37(7,6) D2(-7,5.6) D37(7,5.6) D38(7.4,5.6) E1(-7.4,5.2) E2(-7,5.2) E37(7,5.2) F1(-7.4,4.8) F2(-7,4.8) F37(7,4.8) F38(7.4,4.8) G2(-7,4.4) G37(7,4.4) G38(7.4,4.4) H1(-7.4,4) H2(-7,4) H37(7,4) J2(-7,3.6) J37(7,3.6) J38(7.4,3.6) K1(-7.4,3.2) K2(-7,3.2) K37(7,3.2) K38(7.4,3.2) L2(-7,2.8) L37(7,2.8) M1(-7.4,2.4) M2(-7,2.4) M37(7,2.4) M38(7.4,2.4) N1(-7.4,2) N2(-7,2) N37(7,2) N38(7.4,2) P2(-7,1.6) P37(7,1.6) R1(-7.4,1.2) R2(-7,1.2) R37(7,1.2) R38(7.4,1.2) T2(-7,0.8) T37(7,0.8) T38(7.4,0.8) U2(-7,0.4) U37(7,0.4) V1(-7.4,0) V2(-7,0) V37(7,0) V38(7.4,0) W2(-7,-0.4) W37(7,-0.4) W38(7.4,-0.4) Y1(-7.4,-0.8) Y2(-7,-0.8) Y37(7,-0.8)
  silkscreen extent -8.62,-7.24 7.85,7.24, body extent -7.75,-7.2 7.75,7.2, height 0.9
SM03B-SRSS-TB [mm] "SMD, 3-Leads, Body 5x4.25mm, Pitch 1mm"
  rect 0.6x1.55 smd: 1(-1,2.45) 2(0,2.45) 3(1,2.45)
  rect 1.2x1.8 smd: MP1(-2.3,-1.425) MP2(2.3,-1.425)
  silkscreen extent -2.5,-2.12 2.5,3.67, body extent -2.5,-2.13 2.5,2.82, height 2.96
SM04B-SRSS-TB [mm]
  rect 0.6x1.55 smd: 1(-1.5,0) 2(-0.5,0) 3(0.5,0) 4(1.5,0)
  rect 1.2x1.8 smd: S1(-2.8,-3.875) S2(2.8,-3.875)
  silkscreen extent -3,-4.57 3,0.49, body extent -3,-4.53 3,0.42, height 2.96

## Part data
C1 C2 C3 C4 C5 C6 C7 C8 C9 C10 C11 C12 C13 C14 C15 C16 C17 C18 C19 C20 C23 C24 C25 C26 C27 C28 C29 C30 C33 C34 C35 C36 C37 C38 C39 C40 C41 C42 C43 C44 C45 C46 C47 C48 C49 C50 C51 C52 C53 C54 C55 C58 C60: "CAP 100N 50V X7R 0402", Dielectric=X7R, Voltage=50V, Manufacturer Part Number 1=GRM155R71H104KE14D, Size=0402
C21 C31 C32: "CAP 4.7U 6.3V X5R 0402", Dielectric=X5R, Voltage=6.3V, Manufacturer Part Number 1=GRM155R60J475ME47D, Size=0402
C56 C57 C61 C62 C65 C66 C67 C70 C71 C72 C75 C76: "CAP 1U 25V X5R 0402", Dielectric=X5R, Voltage=25V, Manufacturer Part Number 1=GRM155R61E105KA12D, Size=0402
C63 C64 C68 C69 C73 C74 C77 C78 C79 C80: "CAP 22U 16V X5R 0603", Dielectric=X5R, Voltage=16V, Manufacturer Part Number 1=GRM188R61C226ME01D, Size=0603
J1: "Molex USB 2.0 Type-A Vertical Right Angle"
J2: "JST-SH 4P", Manufacturer Part Number 1=SM04B-SRSS-TB
J3: "JST-SH 3P", Manufacturer Part Number 1=SM03B-SRSS-TB
J4: "FPC"
R1: "RES 240 1% 62.5mW 0402", Manufacturer Part Number 1=RC0402FR-0718KL, Size=0402
R2 R3: "RES 2.2k 1% 62.5mW 0402", Manufacturer Part Number 1=RC0402FR-075K6L, Tolerance=1%, Size=0402
R4 R6 R8 R10 R11: "RES 5.6k 1% 62.5mW 0402", Tolerance=1%, Manufacturer Part Number 1=RC0402FR-075K6L, Size=0603
R5 R7 R9 R12 R13: "RES 1k 1% 62.5mW 0402", Tolerance=1%, Manufacturer Part Number 1=RC0402FR-071KL, Size=0603
U1: "high-performance and low-power quad-core application processor", Package=None, Check_prices=https://www.snapeda.com/parts/RK3566/Fuzhou+Rockchip+Electronics+Co/view-part/?ref=eda, MF="Fuzhou Rockchip Electronics Co", MP=RK3566, SnapEDA_Link=https://www.snapeda.com/parts/RK3566/Fuzhou+Rockchip+Electronics+Co/view-part/?ref=snap
U2: "SDRAM - DDR4 Memory IC 8Gb (512M x 16) Parallel 1.33 GHz 96-FBGA (7.5x13.5)", Package="TFBGA-96 Micron Technology", Check_prices=https://www.snapeda.com/parts/MT40A512M16LY-075:E/Micron/view-part/?ref=eda, MF="Micron Technology Inc.", MP=MT40A512M16LY-075:E, SnapEDA_Link=https://www.snapeda.com/parts/MT40A512M16LY-075:E/Micron/view-part/?ref=snap
U3 U5 U7 U8 U9: "BUCK 3A", Manufacturer Part Number 1=AP63300QWU-7
U4 U6: "LDO 3.3V 250mA", Manufacturer Part Number 1=AP2138N-3.3TRG1

## Nets (pads, with @x,y where several pads share a name; then routed paths per layer and width w, separated by ;. In a path a pad name is that pad's centre, name@x,y a point inside that pad or via, vN(x,y) a via of type N, cw(c..) or ccw(c..) an arc to the next point about the centre after c; other vN are vias at no path point)
5V: C65.1 C70.1 U4.3 U6.3
CAM_IO0: J4.17
CAM_IO1: J4.18
CAM_SCL: J4.20 R2.2
CAM_SDA: J4.21 R3.2
DDR4_A0: U1.A7 U2.P3
DDR4_A1: U1.1D2 U2.P7
DDR4_A2: U1.C1 U2.R3
DDR4_A3: U1.1C3 U2.N7
DDR4_A4: U1.1B6 U2.N3
DDR4_A5: U1.B8 U2.P8
DDR4_A6: U1.B9 U2.P2
DDR4_A7: U1.A10 U2.R8
DDR4_A8: U1.E2 U2.R2
DDR4_A9: U1.B7 U2.R7
DDR4_A10: U1.1A3 U2.M3
DDR4_A11: U1.C2 U2.T2
DDR4_A12: U1.1B3 U2.M7
DDR4_A13: U1.A9 U2.T8
DDR4_A14: U1.1B1 U2.L2
DDR4_A15: U1.1C1 U2.M8
DDR4_BA0: U2.N2
DDR4_BA1: U2.N8
DDR4_CKE: U2.K2
DDR4_CLKN: U2.K8
DDR4_CLKP: U2.K7
DDR4_DM0: U2.E7
DDR4_DM1: U2.E2
DDR4_DMS0_N: U2.F3
DDR4_DMS0_P: U2.G3
DDR4_DMS1_N: U2.A7
DDR4_DMS1_P: U2.B7
DDR4_DQ0: U1.G2 U2.G2
DDR4_DQ1: U1.F2 U2.F7
DDR4_DQ2: U1.F1 U2.H3
DDR4_DQ3: U1.E1 U2.H7
DDR4_DQ4: U1.M2 U2.H2
DDR4_DQ5: U1.K1 U2.H8
DDR4_DQ6: U1.K2 U2.J3
DDR4_DQ7: U1.1E1 U2.J7
DDR4_DQ8: U1.P2 U2.A3
DDR4_DQ9: U1.R1 U2.B8
DDR4_DQ10: U1.R2 U2.C3
DDR4_DQ11: U1.T2 U2.C7
DDR4_DQ12: U1.M1 U2.C2
DDR4_DQ13: U1.1F2 U2.C8
DDR4_DQ14: U1.1F1 U2.D3
DDR4_DQ15: U1.1G2 U2.D7
DDR4_NALE: U2.P9
DDR4_NCS: U2.L7
DDR4_NRST: U2.P1
DDR4_ODT: U2.K3
DDR4_PAR: U2.T3
DDR4_RAS: U1.1A1 U2.L8
FB: R4.2 R5.1 R6.2 R7.1 R8.2 R9.1 R10.2 R11.2 R12.1 R13.1 U3.1 U5.1 U7.1 U8.1 U9.1
GND: C1.2 C2.2 C3.2 C4.2 C5.2 C6.2 C7.2 C8.2 C9.2 C10.2 C11.2 C12.2 C13.2 C14.2 C15.2 C16.2 C17.2 C18.2 C19.2 C20.2 C21.2 C23.2 C24.2 C25.2 C26.2 C27.2 C28.2 C29.2 C30.2 C31.2 C32.2 C33.2 C34.2 C35.2 C36.2 C37.2 C38.2 C39.2 C40.2 C41.2 C42.2 C43.2 C44.2 C45.2 C46.2 C47.2 C48.2 C49.2 C50.2 C51.2 C52.2 C53.2 C54.2 C55.2 C56.2 C57.2 C58.2 C60.2 C61.2 C63.2 C64.2 C65.2 C66.2 C68.2 C69.2 C70.2 C71.2 C73.2 C74.2 C77.2 C78.2 C79.2 C80.2 J1.4 J2.4 J3.3 J4.1 J4.4 J4.7 J4.10 J4.13 J4.16 J4.19 J5.6 R1.2 R5.2 R7.2 R9.2 R12.2 R13.2 U1.1B10 U1.1B11 U1.1B15 U1.1B19 U1.1C4 U1.1C5 U1.1C6 U1.1C8 U1.1C9 U1.1C14 U1.1C16 U1.1C18 U1.1D1 U1.1D3 U1.1D4 U1.1D10 U1.1D14 U1.1E3 U1.1E8 U1.1E10 U1.1E14 U1.1E15 U1.1E17 U1.1F6 U1.1F7 U1.1F8 U1.1F9 U1.1F10 U1.1F15 U1.1F16 U1.1F20 U1.1G3 U1.1G6 U1.1G7 U1.1G8 U1.1G9 U1.1G10 U1.1G11 U1.1G12 U1.1G14 U1.1G16 U1.1G18 U1.1G19 U1.1G20 U1.1H1 U1.1H2 U1.1H6 U1.1H11 U1.1H12 U1.1H13 U1.1J1 U1.1J5 U1.1J6 U1.1J8 U1.1J9 U1.1J11 U1.1J12 U1.1J13 U1.1J16 U1.1J18 U1.1K2 U1.1K3 U1.1K4 U1.1K5 U1.1K6 U1.1K8 U1.1K9 U1.1K11 U1.1K12 U1.1K13 U1.1K14 U1.1K15 U1.1K18 U1.1L3 U1.1L6 U1.1L10 U1.1L11 U1.1L12 U1.1L13 U1.1L14 U1.1L15 U1.1L19 U1.1M3 U1.1M4 U1.1M5 U1.1M6 U1.1M10 U1.1M11 U1.1M12 U1.1M13 U1.1M14 U1.1M15 U1.1M16 U1.1M17 U1.1M18 U1.1M20 U1.1N3 U1.1N4 U1.1N7 U1.1N11 U1.1N12 U1.1N17 U1.1P1 U1.1P5 U1.1P6 U1.1P7 U1.1P8 U1.1P10 U1.1P14 U1.1P15 U1.1R3 U1.1R4 U1.1R5 U1.1R6 U1.1R7 U1.1R8 U1.1R9 U1.1R11 U1.1R12 U1.1R13 U1.1R14 U1.1R15 U1.1T3 U1.1T5 U1.1T7 U1.1T8 U1.1T9 U1.1T10 U1.1T11 U1.1T12 U1.1T13 U1.1T14 U1.1T15 U1.1T16 U1.1T17 U1.1U2 U1.1U12 U1.1U13 U1.1U15 U1.1U17 U1.1V1 U1.1V4 U1.1V7 U1.1V12 U1.1V13 U1.1V18 U1.A1 U1.A2 U1.A38 U1.AA2 U1.AC37 U1.AD2 U1.AE37 U1.AH37 U1.AL37 U1.AP2 U1.AP8 U1.AP13 U1.AP16 U1.AP19 U1.AP22 U1.AP25 U1.AP28 U1.AP31 U1.AP34 U1.AP37 U1.AR1 U1.AR38 U1.B1 U1.B2 U1.B6 U1.B11 U1.B14 U1.B18 U1.B21 U1.B28 U1.B31 U1.D2 U1.E37 U1.H37 U1.J2 U1.L2 U1.L37 U1.P37 U1.U2 U1.U37 U1.W2 U1.Y37 U2.A2 U2.A8 U2.B2 U2.C9 U2.D2 U2.D8 U2.E1 U2.E3 U2.E8 U2.E9 U2.F1 U2.G8 U2.H1 U2.H9 U2.K1 U2.K9 U2.M9 U2.N1 U2.N9 U2.T1 U3.4 U4.1 U5.4 U6.1 U7.4 U8.4 U9.4
MIPI_CSI_D0N: J4.2 U1.AR18
MIPI_CSI_D0P: J4.3 U1.AP18
MIPI_CSI_D1N: J4.5 U1.AP17
MIPI_CSI_D1P: J4.6 U1.AR17
MIPI_CSI_D2N: J4.11 U1.AR15
MIPI_CSI_D2P: J4.12 U1.AP15
MIPI_CSI_D3N: J4.14 U1.AP14
MIPI_CSI_D3P: J4.15 U1.AR14
MIPI_CSI_MCN: J4.8 U1.1U9
MIPI_CSI_MCP: J4.9 U1.1V9
NetC56_1: C56.1 U2.B1
NetC57_1: C57.1 U2.R9
NetC58_1: C58.1 U2.M1
NetC62_1: C62.1 U3.6
NetC67_1: C67.1 U5.6
NetC72_1: C72.1 U7.6
NetC75_1: C75.1 U8.6
NetC76_1: C76.1 U9.6
NetD1_1: J1.1
NetJ2_2: J2.2
NetJ2_3: J2.3
NetJ3_1: J3.1
NetJ3_2: J3.2
NetR1_1: R1.1 U2.F9
SDMMC0_CLK: J5.5 U1.G38
SDMMC0_CMD: J5.3 U1.1E19
SDMMC0_D0: J5.7 U1.1E20
SDMMC0_D1: J5.8 U1.1F19
SDMMC0_D2: J5.1 U1.1D20
SDMMC0_D3: J5.2 U1.1F18
SDMMC0_DET: U1.AF37
SW: C62.2 C67.2 C72.2 C75.2 C76.2 U3.5 U5.5 U7.5 U8.5 U9.5
USB_OTG_D+: J1.2 U1.R37
USB_OTG_D-: J1.3 U1.R38
VCC0V6_DDR: C31.1 C32.1 C33.1 C34.1 C35.1 U1.1E6 U1.1E7 U1.1E9 U1.1F5 U1.1G5
VCC0V9_CPU: C79.1 R10.1
VCC1V2_DDR: C36.1 C37.1 C38.1 C39.1 C40.1 C41.1 C42.1 C43.1 C44.1 C45.1 C46.1 C47.1 C48.1 C49.1 C50.1 C51.1 C52.1 C53.1 C54.1 C55.1 C80.1 R11.1 U2.A1 U2.A9 U2.B3 U2.B9 U2.C1 U2.D1 U2.D9 U2.F2 U2.F8 U2.G1 U2.G7 U2.G9 U2.J1 U2.J2 U2.J8 U2.J9 U2.L1 U2.L9 U2.R1 U2.T9
VCC3V3_SD: C60.1 J5.4
VCC3V3_SYS: C6.1 C7.1 C8.1 C9.1 C10.1 C61.1 C64.1 J4.22 R2.1 R3.1 R4.1 U1.1C13 U1.1D13 U1.1E16 U1.1F17 U1.1H18 U1.1J2 U1.1L4 U1.1L5 U1.1N5 U1.1N6 U1.1N8 U1.1N15 U1.1P16
VCC5V0_SYS: C63.1 C68.1 C73.1 C77.1 C78.1 J2.1 U3.2 U3.3 U5.2 U5.3 U7.2 U7.3 U8.2 U8.3 U9.2 U9.3
VCC_1V8: C66.1 U1.1D15 U1.1D16 U1.1G17 U1.1H4 U1.1H16 U1.1J3 U1.1K17 U1.1N18 U1.1P9 U1.1P12 U1.1P13 U1.1R10 U4.2
VCC_DDR: C21.1 C23.1 C24.1 C25.1 U1.1D5 U1.1D6 U1.1D7 U1.1D8 U1.1D9 U1.1E4 U1.1F4 U1.1G4
VDD0V9_GPU_NPU: C74.1 R8.1
VDD0V9_LOGIC: C69.1 R6.1
VDD_CPU: C1.1 C2.1 C3.1 C4.1 C5.1 U1.1C12 U1.1D11 U1.1D12 U1.1E11 U1.1E12 U1.1E13 U1.1F11 U1.1F12 U1.1F13 U1.1F14 U1.1G13
VDD_GPU: C16.1 C17.1 C18.1 C19.1 C20.1 U1.1L8 U1.1L9 U1.1M7 U1.1M8 U1.1M9
VDD_LOGIC: C11.1 C12.1 C13.1 C14.1 C15.1 U1.1H7 U1.1H8 U1.1H9 U1.1H10 U1.1J7 U1.1J10 U1.1K7 U1.1K10 U1.1L7
VDD_NPU: C26.1 C27.1 C28.1 C29.1 C30.1 U1.1G15 U1.1H14 U1.1H15 U1.1J14 U1.1J15
VDDA_0V9: C71.1 U1.1H5 U1.1H17 U1.1J4 U1.1J17 U1.1K16 U1.1N9 U1.1N10 U1.1N13 U1.1N14 U1.1N16 U1.1P11 U1.1P17 U6.2
pads on no net: J1.5 J1.6 J1.7 J1.8 J2.S1 J2.S2 J3.MP1 J3.MP2 J4.SH1 J4.SH2 J5.G1 J5.G2 J5.G3 J5.G4 U1.1A2 U1.1A4 U1.1A5 U1.1A6 U1.1A7 U1.1A8 U1.1A9 U1.1A10 U1.1A11 U1.1A13 U1.1A14 U1.1A15 U1.1A16 U1.1A17 U1.1A18 U1.1A19 U1.1A20 U1.1B5 U1.1B7 U1.1B8 U1.1B9 U1.1B13 U1.1B14 U1.1B16 U1.1B17 U1.1B18 U1.1B20 U1.1C2 U1.1C7 U1.1C10 U1.1C15 U1.1C17 U1.1C19 U1.1C20 U1.1D17 U1.1D18 U1.1D19 U1.1E2 U1.1E18 U1.1F3 U1.1G1 U1.1H3 U1.1H19 U1.1H20 U1.1J19 U1.1J20 U1.1K19 U1.1K20 U1.1L1 U1.1L2 U1.1M19 U1.1N1 U1.1N2 U1.1N19 U1.1N20 U1.1P2 U1.1P3 U1.1P4 U1.1P18 U1.1P19 U1.1P20 U1.1R1 U1.1R2 U1.1R16 U1.1R17 U1.1R18 U1.1R19 U1.1R20 U1.1T1 U1.1T2 U1.1T4 U1.1T6 U1.1T18 U1.1T19 U1.1T20 U1.1U1 U1.1U3 U1.1U4 U1.1U5 U1.1U6 U1.1U7 U1.1U8 U1.1U11 U1.1U16 U1.1U18 U1.1U19 U1.1U20 U1.1V2 U1.1V3 U1.1V5 U1.1V6 U1.1V8 U1.1V11 U1.1V15 U1.1V16 U1.1V17 U1.1V19 U1.1V20 U1.A3 U1.A5 U1.A12 U1.A13 U1.A15 U1.A17 U1.A19 U1.A20 U1.A22 U1.A23 U1.A26 U1.A27 U1.A29 U1.A30 U1.A32 U1.A33 U1.A35 U1.A37 U1.AA37 U1.AA38 U1.AB1 U1.AB2 U1.AB37 U1.AB38 U1.AC2 U1.AD1 U1.AD37 U1.AD38 U1.AE2 U1.AF1 U1.AF2 U1.AF38 U1.AG2 U1.AG37 U1.AG38 U1.AH2 U1.AJ1 U1.AJ2 U1.AJ37 U1.AJ38 U1.AK2 U1.AK37 U1.AK38 U1.AL1 U1.AL2 U1.AM1 U1.AM2 U1.AM37 U1.AM38 U1.AN2 U1.AN37 U1.AN38 U1.AP1 U1.AP3 U1.AP4 U1.AP5 U1.AP6 U1.AP7 U1.AP9 U1.AP10 U1.AP11 U1.AP12 U1.AP20 U1.AP21 U1.AP23 U1.AP24 U1.AP26 U1.AP27 U1.AP29 U1.AP30 U1.AP32 U1.AP33 U1.AP35 U1.AP36 U1.AR2 U1.AR4 U1.AR6 U1.AR7 U1.AR9 U1.AR10 U1.AR12 U1.AR20 U1.AR21 U1.AR23 U1.AR24 U1.AR26 U1.AR27 U1.AR29 U1.AR30 U1.AR32 U1.AR33 U1.AR35 U1.AR36 U1.B3 U1.B4 U1.B5 U1.B10 U1.B12 U1.B13 U1.B15 U1.B16 U1.B17 U1.B19 U1.B20 U1.B22 U1.B23 U1.B24 U1.B25 U1.B26 U1.B27 U1.B29 U1.B30 U1.B32 U1.B33 U1.B34 U1.B35 U1.B36 U1.B37 U1.B38 U1.C37 U1.D37 U1.D38 U1.F37 U1.F38 U1.G37 U1.H1 U1.H2 U1.J37 U1.J38 U1.K37 U1.K38 U1.M37 U1.M38 U1.N1 U1.N2 U1.N37 U1.N38 U1.T37 U1.T38 U1.V1 U1.V2 U1.V37 U1.V38 U1.W37 U1.W38 U1.Y1 U1.Y2 U2.L3 U2.M2 U2.T7

## Silkscreen, mask and mechanical layers (free items; w line width, h text height)
Mechanical 1:
  the board outline again, w10